# Altium PCB Power.PcbDoc
Units mil, origin at the board's own origin, x right, y up, seen from the top; angles counter-clockwise.
Board outline 1220.47 x 2874.02 mil, 2 copper layers (Top Layer, Bottom Layer), stack 21 mil thick; 81 components, 52 nets, 292 pads, 112 vias.
Unrouted connection lines stored in the file: 63.
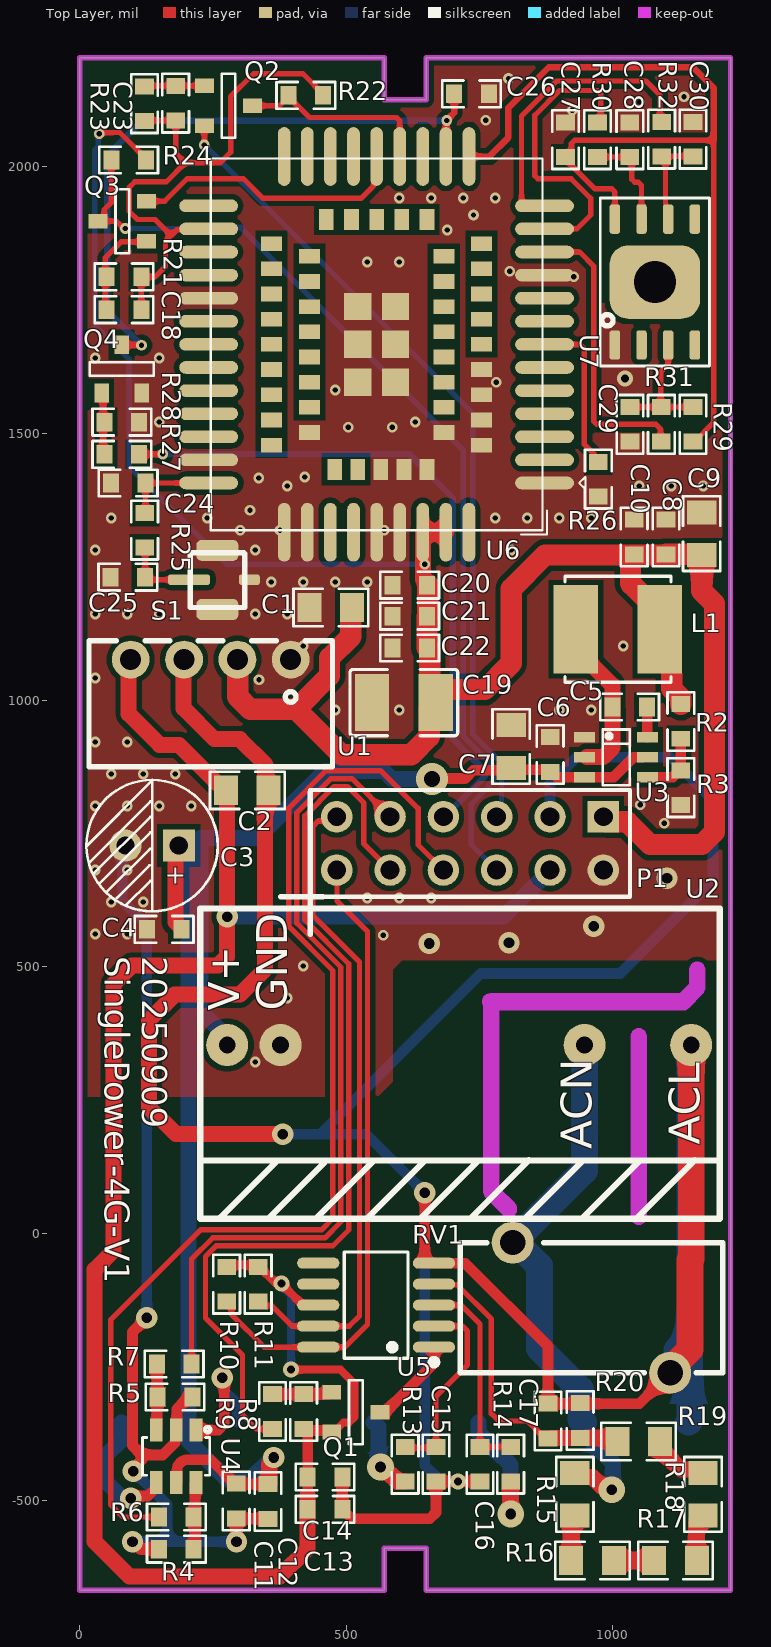
[diagram p0: Top Layer view]
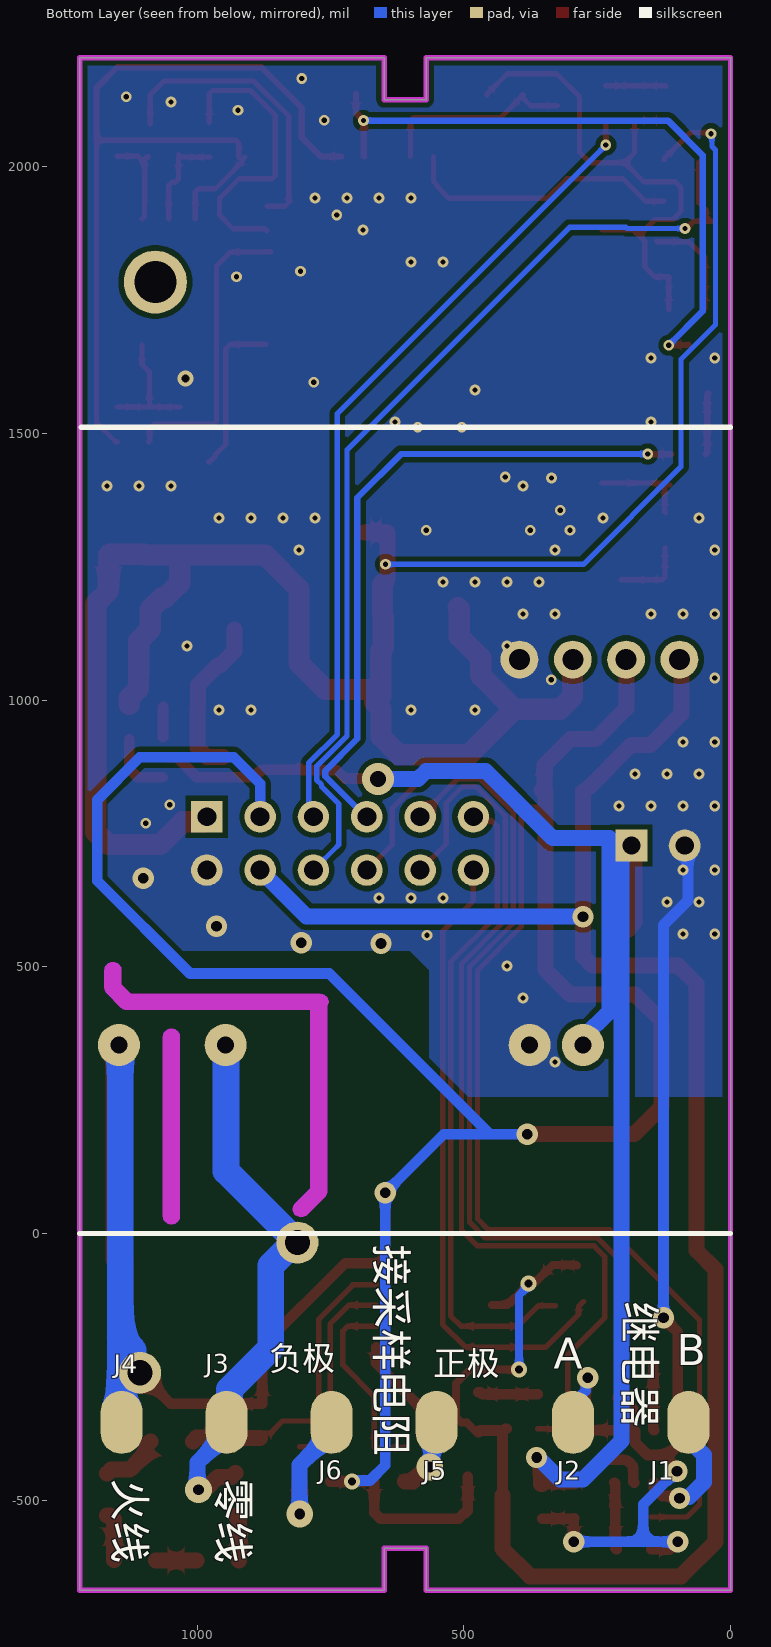
[diagram p1: Bottom Layer view, seen from below]

## Layer stack, top to bottom
Top Solder: solder mask 0.4, Solder Resist, Dk 3.5
Top Layer: signal copper 1.4
Dielectric 2: prepreg 2.8, Composite dielectric, Dk 4.1
Dielectric 1: prepreg 12.6, Composite dielectric, Dk 4.1
Dielectric 3: prepreg 2.8, Composite dielectric, Dk 4.1
Bottom Layer: signal copper 1.4
Bottom Solder: solder mask 0.4, Solder Resist, Dk 3.5

## Board outline
0,-669.29 0,2204.72 570.87,2204.72 570.87,2125.98 649.61,2125.98 649.61,2204.72 1220.47,2204.72 1220.47,-669.29 649.61,-669.29 649.61,-590.55 570.87,-590.55 570.87,-669.29
cut-out: 1033.32,32.2 ccw(c1048.34,32.2) 1063.35,32.2 1063.35,368.8 ccw(c1048.34,368.8) 1033.32,368.8
cut-out: 756.98,78.71 ccw(c772,78.71) 761.4,68.08 761.38,68.09 794.38,35.09 ccw(c805,45.71) 820.01,45.71 ccw(c805,45.71) 815.62,56.33 787.01,84.93 787.01,419.11 1131.56,419.11 ccw(c1131.56,434.13) 1142.19,423.52 1142.17,423.51 1168.68,450.02 1168.67,450 ccw(c1158.06,460.63) 1173.08,460.63 1173.08,493.92 ccw(c1158.06,493.92) 1143.05,493.92 1143.05,466.85 1125.34,449.14 769.7,449.14 ccw(c769.7,434.13) 756.98,426.15

## Design rules (kind name [scope] priority, off if disabled: settings)
Clearance "Via to pad" [IsVia vs IsPad] p1: gap=10 ignorepadtopadclearanceinfootprint=FALSE
Clearance Ploy [InPoly] p2: gap=10 ignorepadtopadclearanceinfootprint=FALSE
Clearance "Track to pad" [IsTrack vs IsPad] p3: gap=8 ignorepadtopadclearanceinfootprint=FALSE
Clearance "Track to track" [IsTrack vs IsTrack] p4: gap=5 ignorepadtopadclearanceinfootprint=FALSE
Clearance "Via to Track" [IsVia vs IsTrack] p5: gap=10 ignorepadtopadclearanceinfootprint=FALSE
Clearance "Via To Via" [IsVia vs IsVia] p6: gap=10 ignorepadtopadclearanceinfootprint=FALSE
ComponentClearance [All] p1: gap=0 collisioncheckmode=3 verticalgap=0 showdistances=FALSE
DiffPairsRouting [All] p1: maxlimit=10 minlimit=7 mostfreqgap=7 toplayer_minwidth=5 toplayer_maxwidth=100 toplayer_prefwidth=7 bottomlayer_minwidth=5 bottomlayer_maxwidth=100 bottomlayer_prefwidth=7 maxuncoupledlength=500
HoleSize [All] p1: absolutevalues=TRUE maxlimit=200 minlimit=1 maxpercent=80.000 minpercent=20.000
HoleToHoleClearance [All] p1: gap=5 allowstackedmicrovias=TRUE
MinimumSolderMaskSliver [All] p1: minsoldermaskwidth=0
PolygonConnect [All vs (InPadClass('All Pads'))] p1: connectstyle=Direct reliefconductorwidth=10 reliefentries=4 polygonreliefangle="90 Angle" airgapwidth=10
PolygonConnect GND焊盘 [InNet('GND_1') vs (InPadClass('All Pads'))] p2: connectstyle=Relief reliefconductorwidth=10 reliefentries=4 polygonreliefangle="90 Angle" airgapwidth=10
PolygonConnect GND过孔 [All vs IsVia] p3: connectstyle=Direct reliefconductorwidth=10 reliefentries=4 polygonreliefangle="90 Angle" airgapwidth=10
RoutingVias RoutingVias_1 [InNet('AGND_1')] p1: holewidth=10 width=20 viastyle="Through Hole" minholewidth=10 minwidth=20 maxholewidth=28 maxwidth=50
RoutingVias [All] p2: holewidth=10 width=20 viastyle="Through Hole" minholewidth=10 minwidth=20 maxholewidth=28 maxwidth=50
SilkToSilkClearance [All] p1: silktosilkclearance=0
SilkToSolderMaskClearance [IsPad] p1: minsilkscreentomaskgap=0 clearancetoexposedcopper=TRUE
SolderMaskExpansion [All] p1: expansion=1 istentingtop=FALSE
Width [All] p1: maxlimit=300 minlimit=5 preferedwidth=7 minimp=50.000000 maximp=50.000000 favimp=50.000000
23 further rules are at their usual default settings.

## Classes and differential pairs
component class 连接: P1
component class 继电器: C11 C12 J1 J2 R4 R5 R6 R7 U4
component class Power: C3 C4 C5 C6 C7 C8 C9 C10 L1 R2 R3 U2 U3
component class 4G: C18 C19 C20 C21 C22 C23 C24 C25 C26 C27 C28 C29 C30 Q2 Q3 Q4 R21 R22 R23 R24 R25 R26 R27 R28 R29 R30 R31 R32 S1 U6 U7
component class 计量: C1 C2 C13 C14 C15 C16 C17 J3 J4 J5 J6 Q1 R8 R9 R10 R11 R13 R14 R15 R16 R17 R18 R19 R20 RV1 U1 U5

## Components (designator, comment, footprint, x,y, rotation, side; value= is the part's Value field where it differs from the comment)
C1 "4.7uF/25V" 0805R 510.87,1173.82 r180 top
C2 "10uF/25V" 0805R 274.52,830.78 r0 top
C3 "100uF/25V" CAPPIND06 185.89,727.21 r180 top
C4 "104/25V" 0603R 125.96,570.22 r0 top
C5 "104/25V" 0603R 998.71,987.15 r0 top
C6 "10uF/25V" 0603R 882.2,930.49 r270 top
C7 "47uF/25V" 0805R 809.18,872.99 r90 top
C8 "10uF/25V" 0603R 1099.45,1338.45 r270 top
C9 "47uF/10V" 0805R 1166.5,1272.05 r90 top
C10 "104/10V" 0603R 1039.92,1338.45 r270 top
C11 "47uF/25V" 0603R 293.55,-534.34 r90 top
C12 "104/25V" 0603R 353.19,-535.29 r90 top
C13 "104/25V" 0603R 492.64,-517.47 r180 top
C14 "10uF/25V" 0603R 492.64,-456.85 r180 top
C15 "68nF/10V" 0603R 668.18,-400.22 r270 top
C16 "68nF/10V" 0603R 750.7,-400.22 r270 top
C17 "10nF/10V" 0603R 878.15,-384.28 r90 top
C18 "1nF/10V/0603" 0603R 50.72,1732.04 r0 top
C19 "100uF/10V" C1210 607.98,995.43 r180 top
C20 "10pF" 0603R 651.32,1215.46 r180 top
C21 "33pF" 0603R 651.32,1157.39 r180 top
C22 "100nF" 0603R 651.32,1097.71 r180 top
C23 "1nF/10V/0603" 0603R 180.18,2151.96 r270 top
C24 "NC" 0603R 58.42,1407.21 r0 top
C25 "NC" 0603R 57.77,1230.66 r0 top
C26 "10nF" 0603R 767.37,2137.03 r180 top
C27 "104" 0603R 911.13,2083.34 r270 top
C28 "33PF" 0603R 1031.75,2018.34 r90 top
C29 "33PF" 0603R 1031.99,1484.56 r90 top
C30 "33PF" 0603R 1150.1,2019.36 r90 top
J1 "J1" 贴片焊盘V1（3*2椭圆） 78.74,-354.33 r270 bottom
J2 "J1" 贴片焊盘V1（3*2椭圆） 295.28,-354.33 r270 bottom
J3 "J1" 贴片焊盘V1（3*2椭圆） 944.88,-354.33 r270 bottom locked
J4 "J1" 贴片焊盘V1（3*2椭圆） 1141.73,-354.33 r270 bottom locked
J5 "J1" 贴片焊盘V1（3*2椭圆） 551.18,-354.33 r90 bottom locked
J6 "J1" 贴片焊盘V1（3*2椭圆） 748.03,-354.33 r270 bottom locked
L1 "4.7uH/3A" 贴片电感5020 930.58,1132.9 r180 top
P1 "Header 6X2" HDR2X6 982.01,781.25 r180 top
Q1 "AO3401" SOT-23 472.7,-297.74 r270 top
Q2 "S8050" SOT-23 233.78,2151.96 r270 top
Q3 "S8050" SOT-23 125.28,1860.73 r90 top
Q4 "S8050" SOT-23 41.37,1575.81 r0 top
R2 "40.2K" 0603R 1127.4,992.57 r270 top
R3 "103" 0603R 1127.4,868.22 r270 top
R4 "4.7K/5%" 0603R 148.81,-592.11 r0 top
R5 "4.7K/5%" 0603R 211.42,-306.66 r180 top
R6 "100R/5%" 0603r 148.81,-531.84 r0 top
R7 "100R/5%" 0603R 144.84,-244.83 r0 top
R8 "47K/5%/0603" 0603R 420.01,-301.57 r270 top
R9 "4.7K/5%/0603" 0603R 361.51,-301.57 r270 top
R10 "2K/5%/0603" 0603R 275.51,-127.75 r90 top
R11 "2K/5%/0603" 0603R 334.66,-127.75 r90 top
R13 "510R/1%" 0603R 610.48,-465.22 r90 top
R14 "510R/1%" 0603R 808.07,-465.22 r90 top
R15 "390K" 0805R 928.51,-529.27 r90 top
R16 "390K" 0805R 1001.66,-613.28 r180 top
R17 "390K" 0805R 1157.2,-613.28 r180 top
R18 "390K" 0805R 1168.75,-449.27 r270 top
R19 "390K" 0805R 1008.08,-390.26 r0 top
R20 "510R/1%" 0603R 938.51,-318.29 r270 top
R21 "4.7K/5%/0603" 0603R 50.73,1793.66 r0 top
R22 "10K/5%/0603" 0603R 456.74,2134.02 r180 top
R23 "4.7K/5%/0603" 0603R 121.49,2150.91 r270 top
R24 "10K/5%/0603" 0603R 59.38,2012.74 r0 top
R25 "0R/5%/0603" 0603R 121.87,1351.3 r270 top
R26 "4.7K" 0603R 972.54,1446.83 r270 top
R27 "4.7K" 0603R 111.5,1461 r180 top
R28 "47K" 0603R 46.5,1521.27 r0 top
R29 "10K" 0603R 1150.23,1484.56 r90 top
R30 "0R" 0603R 971.11,2018.34 r90 top
R31 "0R" 0603R 1090.71,1484.56 r90 top
R32 "0R" 0603R 1091.51,2019.36 r90 top
RV1 "7S561K" 10D821K 959.74,-139.3 r0 top
S1 "SMA" RF1-00283天线座 207.18,1173.82 r90 top
U1 "B0303S" B1205S-1WR3 2050.03,1018.84 r180 top
U2 "X1071    90-240V" X1071 1146.8,353.29 r180 top locked
U3 "DIO6930" SOT-23-6DBV 946.81,930.49 r270 top
U4 "BL8023FCBT6R" SOT-23-6 218.22,-368.82 r180 top
U5 "BL0942" BL0942-10pin 664.4,-213.26 r90 top
U6 "ML307A" ML307A 556.83,1667.05 r180 top locked
U7 "SIM_MFF2" VQFN8 1078.57,1783.92 r90 top

## Footprints (in the part's own frame and the unit in brackets; to place one, negate y for a bottom-side part, rotate by r counter-clockwise, add the part's x,y. Pads: shape width x height; smd on the part's side, far side on the other; paste and mask are expansions set on the pad)
10D821K [mm]
  round 2 hole 1.2 copper offset 0,0: 1(-3.75,3.1) 2(3.75,-3.1)
  silkscreen extent -6.25,-3.1 6.25,3.1
0603R [mil]
  rect 30x35 smd: 1(0,0) 2(65,0)
  silkscreen extent -22,-25 88,25
0603r [mil]
  rect 30x35 smd: 1(0,0) 2(65,0)
  silkscreen extent -22,-25 88,25
0805R [mil]
  rect 45x55 smd: 1(0,0) 2(80,0)
  silkscreen extent -30,-35 110,35
B1205S-1WR3 [mm]
  round 1.8 hole 1: 1(42.019,-1.451) 2(44.559,-1.451) 3(47.099,-1.451) 4(49.639,-1.451)
  silkscreen extent 40.03,-2.35 51.63,3.65
BL0942-10pin [mm]
  oval 0.525x2.014 smd: 1(0,0) 2(1,0) 3(2,0) 4(3,0) 5(4,0) 6(4,5.513) 7(3,5.513) 8(2,5.513) 9(1,5.513) 10(0,5.513)
  silkscreen extent -0.86,-0.15 4.53,4.28
C1210 [mm]
  rect 1.635x2.7 smd paste-100 mask+0.051: 1(-1.517,0) 2(1.517,0)
  silkscreen extent -2.56,-1.58 2.56,1.58
CAPPIND06 [mil]
  rect 60x60 hole 34: 1(0,0)
  round 60 hole 34: 2(100,0)
  silkscreen extent -73,-123 173,123
HDR2X6 [mm] "Connector; Header; 6x2 Position"
  rect 1.5x1.5 hole 0.9: 1(0,0)
  round 1.5 hole 0.9: 2(0,2.54) 3(2.54,0) 4(2.54,2.54) 5(5.08,0) 6(5.08,2.54) 7(7.62,0) 8(7.62,2.54) 9(10.16,0) 10(10.16,2.54) 11(12.7,0) 12(12.7,2.54)
  silkscreen extent -1.27,-1.27 13.97,3.81
ML307A [mm]
  oval 2.8x0.6 smd: 1(-8,6.6) 2(-8,5.5) 3(-8,4.4) 4(-8,3.3) 5(-8,2.2) 6(-8,1.1) 7(-8,0) 8(-8,-1.1) 9(-8,-2.2) 10(-8,-3.3) 11(-8,-4.4) 12(-8,-5.5) 13(-8,-6.6) 23(8,-6.6) 24(8,-5.5) 25(8,-4.4) 26(8,-3.3) 27(8,-2.2) 28(8,-1.1) 29(8,0) 30(8,1.1) 31(8,2.2) 32(8,3.3) 33(8,4.4) 34(8,5.5) 35(8,6.6)
  oval 0.6x2.8 smd: 14(-4.4,-8.95) 15(-3.3,-8.95) 16(-2.2,-8.95) 17(-1.1,-8.95) 18(0,-8.95) 19(1.1,-8.95) 20(2.2,-8.95) 21(3.3,-8.95) 22(4.4,-8.95) 36(4.4,8.95) 37(3.3,8.95) 38(2.2,8.95) 39(1.1,8.95) 40(0,8.95) 41(-1.1,8.95) 42(-2.2,8.95) 43(-3.3,8.95) 44(-4.4,8.95)
  rect 1x0.7 smd: 45(-5,4.8) 46(-5,3.6) 47(-5,2.4) 48(-5,1.2) 49(-5,0) 50(-5,-1.2) 51(-5,-2.4) 52(-5,-3.6) 53(-5,-4.8) 59(5,-4.8) 60(5,-3.6) 61(5,-2.4) 62(5,-1.2) 63(5,0) 64(5,1.2) 65(5,2.4) 66(5,3.6) 67(5,4.8) 73(-3.2,4.2) 74(-3.2,3) 75(-3.2,1.8) 76(-3.2,0.6) 77(-3.2,-0.6) 78(-3.2,-1.8) 79(-3.2,-3) 80(-3.2,-4.2) 81(3.2,-4.2) 82(3.2,-3) 83(3.2,-1.8) 84(3.2,-0.6) 85(3.2,0.6) 86(3.2,1.8) 87(3.2,3) 88(3.2,4.2)
  rect 0.7x1 smd: 54(-2.4,-5.95) 55(-1.2,-5.95) 56(0,-5.95) 57(1.2,-5.95) 58(2.4,-5.95) 68(2,5.95) 69(0.9,5.95) 70(-0.2,5.95) 71(-1.3,5.95) 72(-2.4,5.95)
  rect 1.3x1.3 smd: 89(-0.9,1.8) 90(-0.9,0) 91(-0.9,-1.8) 92(0.9,-1.8) 93(0.9,0) 94(0.9,1.8)
  silkscreen extent -9.94,-8.85 7.9,9.05
RF1-00283天线座 [mil]
  rrect50% 19.68x78.74 smd: 1(52,2)
  rrect50% 39.37x78.74 smd: 2(-4,-51) 2(107,-51)
  rrect50% 19.68x39.37 smd: 2(52,-111)
  silkscreen extent 0,-102 102,0
SOT-23 [mm]
  rect 0.7x0.9 smd: 1(0,0) 2(1.9,0) 3(0.95,2.3)
  silkscreen extent -0.57,0.82 2.47,1.47
SOT-23-6 [mm]
  rect 0.6x1.1 smd: 1(0,0) 2(0.95,0) 3(1.9,0) 4(1.9,2.5) 5(0.95,2.5) 6(0,2.5)
  silkscreen extent -0.69,-0.15 2.55,2.15
SOT-23-6DBV [mm]
  rect 0.5x1 smd: 1(0,0) 2(0.95,0) 3(1.9,0) 4(1.9,3) 5(0.95,3) 6(0,3)
  silkscreen extent -0.37,0.86 2.29,2.16
VQFN8 [mm]
  rrect50% 3.5x4.3 smd: 0(0,0)
  round 3 hole 2: 0(0,0)
  rrect50% 1.4x0.5 smd: 1(-3,1.905) 2(-3,0.635) 3(-3,-0.635) 4(-3,-1.905) 5(3,-1.905) 6(3,-0.635) 7(3,0.635) 8(3,1.905)
  silkscreen extent -4,-2.6 4,2.6
X1071 [mm]
  round 2 hole 0.8: 1(0,0) 2(5.08,0) 4(19.56,0) 5(22.1,0)
  silkscreen extent -1.36,-6.5 23.38,8.28
贴片焊盘V1（3*2椭圆） [mm]
  oval 3x2 smd: 1(0,0)
贴片电感5020 [mm]
  rect 2.124x4.22 smd: 1(0,0) 2(-4,0)
  silkscreen extent -4.53,-2.53 0.53,2.53

## Part data
C1 C2: library part CAP+
C3 C7 C9 C19: library part "Cap Pol1", "Polarized Capacitor (Radial)", LatestRevisionDate=17-Jul-2002, LatestRevisionNote="Re-released for DXP Platform.", PackageDescription="Polarized Capacitor (Radial); 2 Leads", PackageReference=RB7.6-15, Published=8-Jun-2000, Publisher="Altium Limited"
C4 C5 C10 C11 C12 C13 C14 C20 C21 C22 C26: library part CAP_1
C6 C8 C15 C16 C17 C18 C23 C24 C25 C27 C28 C29 C30: library part CAP
L1: library part Inductor, "Inductor", Code_IEC=1005, Code_JEITA=0402, LatestRevisionDate=29-May-2009, LatestRevisionNote="IPC-7351 Footprint Added.", PackageDescription="Chip Inductor", PackageReference=0402-A, Published=8-Jun-2000, Publisher="Altium Limited"
P1: "Header, 6-Pin, Dual row", LatestRevisionDate=17-Jul-2002, LatestRevisionNote="Re-released for DXP Platform.", Publisher="Altium Limited"
Q1: library part PNP
Q2 Q3 Q4: library part NPN
R2 R3 R22 R24 R29 R30 R31 R32: library part Res2, "Resistor", LatestRevisionDate=17-Jul-2002, LatestRevisionNote="Re-released for DXP Platform.", PackageDescription="Axial Device, Thru-Hole; 2 Leads; 0.4 in Pin Spacing", PackageReference=AXIAL-0.4, Published=8-Jun-2000, Publisher="Altium Limited"
R4 R5 R6 R7 R8 R9 R10 R11 R13 R14 R15 R16 R17 R18 R19 R20 R21 R23 R25 R26 R27 R28: library part RES
RV1: library part "Res Varistor", "Varistor (Voltage-Sensitive Resistor)", Code_IPC=RESC2012, LatestRevisionDate=29-May-2009, LatestRevisionNote="IPC-7351 Footprint Added.", PackageDescription="Chip Resistor 0805 Case Size", PackageReference=6-0805, PackageVersion=Mar-2003, Published=24-Mar-1999, Publisher="Altium Limited"
U1: library part B0505S
U2: library part AD2DC_EMC
U3: library part BL8032
U4: library part BL8023HCB6TR, JLCPCB Part Class="Extended Part", LCSC Part Name="BL8023HCB6TR 继电器驱动芯片 停产", Manufacturer=BL(上海贝岭), Add into BOM=yes, Convert to PCB=yes, Datasheet=https://atta.szlcsc.com/upload/public/pdf/source/20190920/C431145_DEC39E836DB2A2F1462A8BB350F12ABB.pdf, Device=BL8023HCB6TR, Manufacturer Part=BL8023HCB6TR, Supplier=LCSC, Supplier Footprint=SOT-23-6, Supplier Part=C431145, Symbol=BL8023HCB6TR
U5: library part BL0942_C2837510, JLCPCB Part Class="Extended Part", LCSC Part Name=BL0942内置时钟免校准计量芯片, Manufacturer=BL(上海贝岭), Add into BOM=yes, Convert to PCB=yes, Datasheet=https://atta.szlcsc.com/upload/public/pdf/source/20220627/BFAD44701CA6DE9A8853C5A4834B6884.pdf, Device=BL0942_C2837510, Manufacturer Part=BL0942, Supplier=LCSC, Supplier Footprint=SSOP-10-150mil, Supplier Part=C2837510, Symbol=BL0942
U6: PCB DECAL=MOD_ML307

## Via types
v1: diameter 20, hole 10, Top Layer to Bottom Layer, 90 vias
v2: diameter 40, hole 20, Top Layer to Bottom Layer, 14 vias
v3: diameter 30, hole 15, Top Layer to Bottom Layer, 4 vias
v4: diameter 50, hole 20, Top Layer to Bottom Layer, 3 vias
v5: diameter 60, hole 30, Top Layer to Bottom Layer, 1 vias

## Nets (pads, with @x,y where several pads share a name; then routed paths per layer and width w, separated by ;. In a path a pad name is that pad's centre, name@x,y a point inside that pad or via, vN(x,y) a via of type N, cw(c..) or ccw(c..) an arc to the next point about the centre after c; other vN are vias at no path point)
4G_MCU_RXD: P1.6 Q3.3 R24.1 | length 1834.5
  Top Layer w10: R24.1@59.38,2008.34 59.38,1932.88 46.03,1919.54 46.03,1906.91 37.25,1898.13 Q3.3 68.66,1898.13 82.5,1884.29 v1(85.21,1884.29)
  Bottom Layer w10: v1(85.21,1884.29) 193.83,1884.29 196.04,1886.5 301.95,1886.5 719.19,1469.26 719.19,932.67 776.09,875.77 776.09,850.61 767.05,841.57 767.05,837.85 734.48,805.27 734.48,728.93 737.4,726 P1.6@782.2,681.2
4G_MCU_TXD: P1.5 Q2.2 | length 1530.5
  Top Layer w10: v1(233.78,2040.95) Q2.2
  Bottom Layer w10: v1(233.78,2040.95) 737.3,1537.42 737.3,935.77 791.09,881.98 791.09,790.09 P1.5@782.2,781.2
4G_Reset: P1.7 R27.1 | length 1279.8
  Top Layer w12: R27.1 154.98,1461 v1(155.51,1461.53) v1@156.04,1462.06
  Bottom Layer w12: v1(155.51,1461.53) 617.67,1461.53 699.78,1379.42 699.78,927.49 760.09,867.18 760.09,857.24 684.05,781.2 P1.7@682.2,781.2
BL0942_Control: P1.10 R9.2 | length 1784.8
  Top Layer w10: R9.2 331.18,-366.57 305.45,-340.85 305.45,-227.92 235.98,-158.44 235.98,-43.14 255.78,-23.33 474.61,-23.33 504.61,6.67 504.61,505.54 422.39,587.76 422.39,782.91 477.16,837.67 502.1,837.67 533,806.77 533,730.4 P1.10@582.2,681.2
BL0942_RXD: P1.11 R11.1 U5.9 | length 1226.2
  Top Layer w10: R11.1@328.91,-135.54 359.87,-135.54 398.22,-173.89 U5.9 505.51,-173.89 524.86,-154.54 524.86,508.57 437.39,596.04 437.39,763.36 447.23,773.2 474.2,773.2 P1.11@482.2,781.2
BL0942_TXD: P1.12 R10.1 U5.10 | length 1201.5
  Top Layer w10: R10.1 284.78,-137.02 284.78,-151.9 346.15,-213.26 U5.10 497.32,-213.26 539.86,-170.72 539.86,566.32 482.48,623.7 P1.12@482.48,680.92
GND: C1.2 C3.2 C4.1 C6.1 C7.2 C8.1 C9.2 C10.1 C11.1 C12.1 C19.2 C20.2 C21.2 C22.2 C24.1 C25.1 C26.1 C27.1 C28.2 C29.1 C30.2 P1.2 Q4.2 R3.2 R4.1 R5.1 R26.2 R28.2 S1.2 U1.1 U2.4 U3.1 U4.2 U6.1 U6.10 U6.27 U6.34 U6.36 U6.37 U6.40 U6.41 U6.45 U6.46 U6.47 U6.48 U6.70 U6.71 U6.72 U6.73 U6.88 U6.89 U6.90 U6.91 U6.92 U6.93 U6.94 U7.1 | length 1906
  Top Layer w20: v2(99.01,-578.28) 112.83,-592.11 R4.1 ; v2(100.48,-445.82) 100.48,-440.4 116.91,-423.97 116.91,-415.57 ; v2(125.76,-158.26) 99.01,-185.02 99.01,-397.66 116.91,-415.57 ; R5.1 211.42,-309.16 206.42,-314.16 197.97,-314.16 182.63,-329.49 182.63,-367.01 179.01,-370.63 179.01,-392.15 155.59,-415.57 116.91,-415.57 ; C11.1 C11.1@294.03,-534.82 ; v2(294.03,-578.28) C11.1@294.03,-534.82 ; C12.1 352.71,-534.82 C11.1@294.03,-534.82
  Bottom Layer w20: C3.2@79.81,726.71 79.81,681.56 79.81,624.15 125.76,578.2 v2(125.76,-158.26) ; v2(99.01,-578.28) 163.92,-578.28 ; v2(100.48,-445.82) 101.57,-445.82 163.92,-508.17 163.92,-578.28 ; v2(294.03,-578.28) 163.92,-578.28
  other v1: 329.27,321.56 389.27,441.56 419.27,501.56 569.27,559 29.27,561.56 89.27,561.56 59.27,621.56 119.27,621.56 539.27,629 599.27,629 659.27,629 29.27,681.56 89.27,681.56 1096.49,769.23 29.27,801.56 89.27,801.56 149.27,801.56 209.27,801.56 1051.49,803.78 59.27,861.56 119.27,861.56 179.27,861.56 29.27,921.56 89.27,921.56 479.27,981.56 599.27,981.56 899.27,981.56 959.27,981.56 336.24,1038.11 29.27,1041.56 419.27,1101.56 1019.27,1101.56 29.27,1161.56 89.27,1161.56 149.27,1161.56 329.27,1161.56 389.27,1161.56 359.27,1221.56 419.27,1221.56 479.27,1221.56 539.27,1221.56 29.27,1281.56 329.27,1281.56 809.27,1281.56 300.9,1318.63 375.74,1318.63 570.87,1318.63 59.27,1341.56 239.27,1341.56 779.27,1341.56 839.27,1341.56 899.27,1341.56 959.27,1341.56 319.34,1355.83 389.27,1401.56 1049.27,1401.56 1109.27,1401.56 1169.27,1401.56 335.7,1416.64 422.17,1418.43 503.86,1511.81 586.32,1511.81 149.27,1521.56 629.27,1521.56 479.27,1581.56 781.31,1596.18 29.27,1641.56 149.27,1641.56 926.45,1793.66 806.25,1804.07 539.27,1821.56 599.27,1821.56 689.27,1881.56 738.57,1909.61 599.27,1941.56 659.27,1941.56 719.27,1941.56 779.27,1941.56 761.51,2087.53 923.61,2105.84 1049.27,2121.56 1133.14,2131.52 804,2165.78
  other v2: 655.46,543.65 805.22,545.22 963.89,575.98 1101.35,665.99
  other v3: 1022.19,1603.53
IN1: C16.1 R14.2 U5.3 | length 388.5
  Top Layer w10: U5.3 715.14,-134.52 750.7,-170.09 C16.1 R14.2
IP1: C15.1 R13.2 U5.2 | length 366.8
  Top Layer w10: R13.2 612.06,-401.8 666.6,-401.8 C15.1 668.18,-305.7 727.04,-246.84 727.04,-183.33 717.61,-173.89 U5.2
Lin: C2.2 C13.1 C14.1 C15.2 C16.2 C17.2 J4.1 P1.3 R20.1 RV1.2 U1.3 U2.1 U5.5 | length 6382.1
  Top Layer w20: C14.1 492.64,-519.97 497.64,-524.97 500.14,-524.97 510.14,-534.97 656.46,-534.97 668.18,-523.26 C15.2 v3(709.44,-465.22) C16.2 ; v2(647.3,76.2) 647.3,-55.47 647.61,-55.78 U5.5 722.7,-55.78 878.15,-211.24 C17.2 1049.45,-319.28 RV1.2
  Top Layer w30: U1.3@195.12,1075.34 195.12,984.53 252.82,926.82 300.46,926.82 348.69,878.59 348.69,836.73 C2.2@354.58,830.84 ; C2.2@347.21,830.02 347.21,494.73 300.23,447.76 178.29,447.76 129.81,399.28 129.81,237.01 180.82,186 v2(381,186)
  Top Layer w50: RV1.2 1107.38,-254.87 1144.56,-217.69 1144.56,-50.3 1146.8,-48.07 U2.1
  Bottom Layer w20: v2(381,186) 450.86,186 ; v3(709.44,-465.22) 707.53,-463.31 675.99,-463.31 647.3,-434.62 v2(647.3,76.2) 537.5,186 450.86,186 ; P1.3 882.01,843.2 931.75,892.93 1107.63,892.93 1187.75,812.81 1187.75,661.57 1013.57,487.39 752.25,487.39 450.86,186
  Bottom Layer w50: RV1.2@1120.26,-270.79 1120.26,-219.01 1144.26,-195 ; U2.1@1141.3,358.79 U2.1 1144.26,350.76 1144.26,-195 ; J4.1 1144.26,-351.8 1144.26,-195
MAIN_RXD: Q2.3 R22.2 U6.17 | length 376.2
  Top Layer w10: Q2.3 374.78,2114.56 R22.2@391.74,2131.52 ; R22.2@388.1,2135.16 R22.2@391.74,2131.52 ; R22.2 R22.2@391.74,2131.52 ; U6.17 600.14,2086.53 594.28,2092.39 430.87,2092.39 R22.2@391.74,2131.52
MAIN_TXD: Q3.2 U6.18 | length 525.6
  Top Layer w10: Q3.2 159.4,1935.53 201.56,1977.69 307.02,1977.69 343.79,1940.92 527.56,1940.92 550.83,1964.19 550.83,1966.42 556.83,1972.42 U6.18
NET_LIGHT: U6.16
NET_STATE: U6.25
NetC5_1: C5.1 L1.1 U3.2 | length 308.3
  Top Layer w30: L1.1 930.58,1091.64 957.39,1064.83 962.13,1064.83 998.71,1028.25 998.71,984.65 999.24,984.12 999.24,910.87 981.66,893.3 U3.2@951.5,893.3
NetC5_2: C5.2 U3.6 | length 57.4
  Top Layer w20: C5.2 1064.31,986.54 1064.31,930.65 1064.47,930.49 U3.6
NetC18_1: C18.1 Q3.1 R21.1 | length 201.3
  Top Layer w10: C18.1 48.22,1734.54 48.22,1793.66 48.22,1829.65 77.86,1859.29 137.13,1859.29 Q3.1@138.19,1860.35
NetC23_1: C23.1 Q2.1 R23.1 | length 112.7
  Top Layer w10: R23.1 122.54,2151.96 C23.1 Q2.1
NetC24_2: C24.2 R25.1 U6.35 | length 175.2
  Top Layer w10: C24.2@114.19,1403.24 C24.2@114.34,1403.38 ; R25.1 123.42,1352.84 C24.2 U6.35
NetC25_2: C25.2 R25.2 S1.1 | length 140.4
  Top Layer w10: R25.2 122.77,1285.4 C25.2 127.6,1225.82 S1.1
NetC28_1: C28.1 R30.1 U7.7 | length 188.9
  Top Layer w10: R30.1@976.05,2018.34 1030.47,2018.34 C28.1@1035.12,2022.99 ; C28.1@1035.12,2018.34 1035.12,1976.89 1040.97,1971.03 1047.71,1971.03 1053.57,1965.17 U7.7
NetC29_2: C29.2 R29.2 R31.2 U7.3 | length 240.9
  Top Layer w10: C29.2 R31.2 ; U7.3 1103.57,1629.14 1089.39,1614.96 1089.39,1550.88 R31.2 ; R29.2 1097.15,1549.56 R31.2
NetC30_1: C30.1 R32.1 U7.6 | length 188.6
  Top Layer w10: U7.6 1098.73,1906.88 1098.73,1930.3 1098.58,1930.45 1098.58,2012.28 R32.1 1094.01,2019.36 1099.83,2013.53 R32.1@1104.01,2009.36 ; R32.1@1103.57,2012.46 1111.19,2020.08 C30.1@1150.1,2020.08
NetJ5_1: J5.1 R13.1 | length 146.8
  Top Layer w30: v4(564.01,-438.16) 568.36,-438.16 595.42,-465.22 R13.1
  Bottom Layer w30: J5.1 560.18,-363.33 560.18,-434.33 v4(564.01,-438.16)
NetJ6_1: J6.1 R14.1 | length 257.8
  Top Layer w30: v4(808.07,-526.26) R14.1
  Bottom Layer w30: J6.1 748.03,-374.02 808.07,-434.05 v4(808.07,-526.26)
NetQ1_1: Q1.1 R8.1 R9.1 | length 112.8
  Top Layer w20: R9.1 464.93,-301.57 468.76,-297.74 Q1.1
NetQ1_3: Q1.3 U5.1 | length 169.2
  Top Layer w20: Q1.3 567.03,-331.37 576.33,-331.37 664.4,-243.29 U5.1
NetQ4_1: Q4.1 R27.2 R28.1 | length 116.9
  Top Layer w12: Q4.1 43.93,1573.25 43.93,1463.56 R27.2
NetR2_2: R2.2 R3.1 U3.4 | length 126.3
  Top Layer w20: U3.4 1112.36,855.69 1124.9,868.22 R3.1 R2.2@1127.4,926.82
NetR4_2: R4.2 R6.2 U4.6 | length 126.7
  Top Layer w20: R4.2 216.41,-589.51 216.41,-469.05 U4.6
NetR5_2: R5.2 R7.1 U4.3 | length 124.7
  Top Layer w20: U4.3 144.92,-367.32 144.92,-244.91 R7.1
NetR15_1: R15.1 R16.2 | length 86.9
  Top Layer w30: R16.2 921.66,-536.13 R15.1
NetR16_1: R16.1 R17.2 | length 75.5
  Top Layer w30: R16.1 R17.2
NetR17_1: R17.1 R18.2 | length 91.1
  Top Layer w30: R17.1@1156.15,-612.23 1156.15,-541.87 1156.25,-541.77 1156.25,-536.77 1163.75,-529.27 R18.2
NetR18_1: R18.1 R19.2 | length 114.1
  Top Layer w30: R19.2 1095.58,-397.76 1095.58,-412.07 1126.63,-443.12 1161.25,-443.12 R18.1@1168.75,-450.62
Nin: J3.1 R15.2 RV1.1 U2.2 | length 1298
  Top Layer w30: R15.2 936.01,-456.77 961.22,-456.77 981.2,-476.76 993.93,-476.76 v4(997.76,-480.58)
  Bottom Layer w30: J3.1 944.88,-374.92 999.87,-429.91 999.87,-478.47 v4(997.76,-480.58)
  Bottom Layer w50: U2.2@941.3,358.79 U2.2 946.8,117.45 946.15,116.8 ; J3.1 939.38,-348.83 939.38,-292.67 862.32,-215.6 862.32,-60.91 818.67,-17.25 RV1.1 946.15,116.8 ; U2.2@946.15,352.65 946.15,116.8
PWR_ON/OFF: R26.1 U6.7 | length 304.5
  Top Layer w10: U6.7 938.13,1667.05 946.48,1658.69 946.48,1479.53 966.3,1459.71 966.3,1457.21 976.3,1447.21 R26.1@978.8,1447.21
Relay_C_A: P1.9 R7.2 | length 1537.9
  Top Layer w10: R7.2 209.84,-48.07 249.57,-8.33 460,-8.33 489.61,21.28 489.61,499.33 407.39,581.55 407.39,789.12 470.94,852.67 510.73,852.67 P1.9@582.2,781.2
Relay_C_B: P1.8 R6.1 | length 2182.2
  Top Layer w10: R6.1 81.52,-531.84 58.07,-508.39 58.07,-162.02 226.76,6.67 453.79,6.67 474.61,27.49 474.61,493.11 392.39,575.34 392.39,797.87 462.19,867.67 563.88,867.67 634.61,796.94 634.61,728.79 P1.8@682.2,681.2
Relay_O_A: J1.1 U4.4 | length 248.2
  Top Layer w20: v2(95.54,-496.36) 99.36,-492.53 127.98,-492.53 143.42,-477.09 U4.4
  Bottom Layer w30: J1.1 78.74,-386.59 49.37,-415.96 49.37,-465.9 77.91,-494.44 93.62,-494.44 v2(95.54,-496.36)
Relay_O_B: J2.1 U4.1 | length 240.8
  Top Layer w20: U4.1 259.61,-368.82 271.33,-357.1 271.33,-274.68 v2(267.5,-270.85)
  Bottom Layer w20: v2(267.5,-270.85) 271.33,-274.68 271.33,-294.8 295.28,-318.75 J2.1
RESET_N: C26.2 Q4.3 U6.15 | length 1207.4
  Top Layer w12: Q4.3 79.17,1665.96 115.45,1665.96 v1(115.85,1665.57) ; U6.15 687.56,2020.22 687.56,2085.93 v1(688.36,2086.74) 688.36,2087.53 702.37,2101.53 C26.2
  Bottom Layer w12: v1(115.85,1665.57) 51.88,1729.54 51.88,2021.4 117.22,2086.74 v1(688.36,2086.74)
USIM_CLK: R32.2 U6.13 | length 557.8
  Top Layer w10: U6.13@868.9,1926.01 835.58,1926.01 828.41,1933.19 828.41,2095.13 894.1,2160.83 1061.97,2160.83 1088.34,2134.45 R32.2@1088.34,2080.18
USIM_DATA: R31.1 U6.11 | length 560
  Top Layer w10: U6.11@861.83,1840.96 U6.11@871.79,1840.96 ; U6.11 937.7,1840.28 963.89,1814.09 963.89,1522.93 969.75,1517.07 1080.86,1517.07 1089.22,1508.7 1089.22,1486.05 R31.1
USIM_DET: U6.79
USIM_RST: R30.2 U6.12 | length 567.6
  Top Layer w10: U6.12@869.2,1879.83 873.29,1883.91 932.69,1883.91 958.39,1909.61 958.39,1940.92 921.62,1977.69 859.3,1977.69 853.44,1983.55 853.44,2096.45 900.15,2143.17 971.31,2143.17 977.17,2137.31 R30.2@977.17,2083.57
USIM_VDD: C27.2 R29.1 U6.14 U7.8 | length 1725
  Top Layer w10: C27.2 917.51,2008.34 917.51,2007.53 966.23,1958.81 997.71,1958.81 1000.64,1955.88 1003.57,1952.95 U7.8 ; C27.2@922.03,2018.04 922.03,2043.78 927.89,2049.64 1188.93,2049.64 1188.93,1520.76 1152.73,1484.56 R29.1
  Top Layer w12: U6.14 768.27,2019.41 804,2055.14 804,2110.88 879.82,2186.71 1150.04,2186.71 1188.93,2147.82 1188.93,2049.64
VCC12: C3.1 C4.2 C6.2 C7.1 C11.2 C12.2 U2.5 U3.3 U3.5 U4.5 | length 3123
  Top Layer w20: U4.5 182.63,-465.43 182.63,-444.34 cw(c202.63,-444.4) 182.89,-441.18 183.76,-435.89 187.15,-431.74 cw(c202.63,-444.4) 191.91,-427.52 192.5,-427.14 cw(c203.69,-446.74) 203.69,-424.17 245.89,-424.17 291.05,-469.34 C11.2 294.03,-469.82 352.71,-469.82 C12.2 ; v5(660.7,852.18) 661.45,852.92 722.55,852.92 738.22,868.59 804.79,868.59 C7.1 812.93,869.24 878.45,869.24 C6.2 884.7,865.49 894.5,855.69 U3.3 1001.37,855.69 1038.61,892.93 U3.5@1055.24,892.93
  Top Layer w30: C3.1@179.81,726.71 179.81,583.86 190.96,572.72 C4.2 ; C12.2 355.69,-470.29 355.69,-430.95 363.67,-422.97 v2(363.67,-420.26)
  Bottom Layer w30: C3.1 C3.1@210.05,703.05 ; C3.1@202.27,704.25 226.86,728.84 226.86,416.34 276.72,366.48 U2.5 ; C3.1@203.97,702.55 203.97,-388.87 276.22,-461.11 320.11,-461.11 360.96,-420.26 v2(363.67,-420.26) ; 226.86,741.09 333.29,741.09 459.32,867.12 570.7,867.12 585.64,852.18 v5(660.7,852.18)
VCC33: C1.1 C8.2 C9.1 C10.2 C19.1 C20.1 C21.1 C22.1 L1.2 P1.1 R2.1 R24.2 U1.2 U6.42 U6.43 | length 4351.6
  Top Layer w10: v1(36.65,2062.27) 38.57,2064.19 61.27,2064.19 61.55,2064.46 75.16,2064.46 124.38,2015.24 R24.2
  Top Layer w30: C20.1@651.32,1217.96 643.45,1225.82 U6.42 U6.43
  Top Layer w40: U1.2@296.24,1075.48 296.24,1006.42 319.67,982.99 405.52,982.99 ; C1.1 508.37,1171.32 508.37,1119.02 468.51,1079.15 468.51,1045.98 405.52,982.99 ; C20.1@651.32,1217.96 652.5,1216.77 652.5,1158.56 C21.1 C22.1 656.18,1092.84 656.18,1006.97 C19.1 ; P1.1@982.01,777.3 987.59,771.72 1026.98,771.72 1069.47,729.23 1167.04,729.23 1190.47,752.66 1190.47,1180.84 1166.5,1204.81 C9.1 ; C10.2@1032.86,1272.05 1032.86,1219.4 1060.21,1192.05 1066.25,1192.05 1088.06,1170.24 L1.2 1109.87,1111.09 1109.87,1046.52 1110,1046.4 1110,1021.48 1127.4,1004.08 R2.1@1127.4,991.82 ; C8.2@1099.45,1272.05 872.64,1272.05 809.18,1208.6 809.18,1069.26 759.91,1019.98 679.91,1019.98 667.72,1007.8 C19.1 ; C8.2@1099.54,1273.54 C9.1@1165.01,1273.54 ; 405.52,982.99 490.83,897.67 621.58,897.67 655.54,931.63 655.54,983.24 C19.1
  Bottom Layer w10: v1(36.65,2062.27) 34.74,2060.36 34.74,2038.03 28.22,2031.51 28.22,1703.84 92.85,1639.21 92.85,1437.78 275.99,1254.63 v1(646.96,1254.63)
VCC33_G: C2.1 C13.2 C14.2 P1.4 Q1.2 R8.2 R10.2 R11.2 U1.4 U5.8 | length 3913.7
  Top Layer w15: R10.2@287.86,-59.7 288.55,-59.01 333.42,-59.01 365.72,-91.32 375.8,-91.32 v3(378.67,-94.19) 378.67,-94.67 418.53,-134.52 U5.8 ; v3(396.4,-255.52) 488.87,-255.52 515.22,-281.86 515.22,-344.29 504.61,-354.9 494.28,-354.9 476.63,-372.55 Q1.2
  Top Layer w20: R8.2 422.51,-366.57 R8.2@425.5,-369.56 ; 427.64,-480.58 427.64,-371.7 R8.2@425.5,-369.56 ; Q1.2 469.71,-369.56 R8.2@425.5,-369.56
  Top Layer w30: U1.4 92.02,1072.25 92.02,974.07 149.78,916.31 185.92,916.31 C2.1@267.21,835.02 ; C2.1@276.58,828.71 276.58,519.57 259.01,502 97.73,502 63.81,468.08 63.81,-32.05 28.04,-67.82 28.04,-577.86 93.18,-642.99 375.56,-642.99 427.64,-590.92 427.64,-491.11 ; C13.2 C13.2@427.64,-506.94
  Bottom Layer w15: v3(378.67,-94.19) 378.67,-98.25 396.4,-115.97 v3(396.4,-255.52)
  Bottom Layer w30: v2(276.58,594) 794.77,594 P1.4
VDD_EXT: C18.2 C23.2 R21.2 R22.1 R23.2 U6.24 | length 1072.4
  Top Layer w10: C18.2 R21.2 141.27,1793.66 160.98,1813.37 160.98,1860.53 171.66,1871.21 ; R23.2 122.54,2086.96 C23.2 180.18,2026.36 198.68,2007.85 ; U6.24 240.17,1881.89 182.34,1881.89 171.66,1871.21 ; R22.1 456.74,2136.52 418.7,2174.56 326.26,2174.56 283.22,2131.52 283.22,2027.29 263.79,2007.85 198.68,2007.85 ; 171.66,1871.21 141.57,1901.3 108.21,1901.3 92.8,1916.71 92.8,1961.29 103.53,1972.03 162.86,1972.03 198.68,2007.85
VP: C17.1 R19.1 R20.2 U5.4 | length 561.1
  Top Layer w10: U5.4 665.82,-96.57 708.12,-96.57 771.93,-160.38 771.93,-337.93 785.8,-351.8 839.84,-351.8 862.32,-374.28 873.67,-374.28 C17.1@877.12,-377.72
  Top Layer w30: C17.1@882.69,-383.29 R20.2@937.64,-383.29 ; R20.2@938.68,-383.29 949.79,-383.29 949.97,-383.12 1000.93,-383.12 R19.1
pads on no net: U5.6 U5.7 U6.2 U6.3 U6.4 U6.5 U6.6 U6.8 U6.9 U6.19 U6.20 U6.21 U6.22 U6.23 U6.26 U6.28 U6.29 U6.30 U6.31 U6.32 U6.33 U6.38 U6.39 U6.44 U6.49 U6.50 U6.51 U6.52 U6.53 U6.54 U6.55 U6.56 U6.57 U6.58 U6.59 U6.60 U6.61 U6.62 U6.63 U6.64 U6.65 U6.66 U6.67 U6.68 U6.69 U6.74 U6.75 U6.76 U6.77 U6.78 U6.80 U6.81 U6.82 U6.83 U6.84 U6.85 U6.86 U6.87 U7.0 U7.2 U7.4 U7.5

## Polygon pours and split planes (outlines as drawn)
GND on Bottom Layer "NONET_L-01_P-001" (solid, remove dead copper, pour order 1): -25.72,256.72 328.91,256.72 328.19,256 559,256 565,262 565,493.62 601.51,530.13 1317,530.13 1317,2328 1201,2444 -215,2444 -439,2220 -439,670
GND on Top Layer "NONET_L-01_P-001" (solid, remove dead copper, pour order 0): -101,256 328.19,256 559,256 587.22,284.22 587.22,494.01 605.08,511.87 1317,511.87 1317,2328 1201,2444 -215,2444 -439,2220 -439,594

## Keep-outs
Keep-Out Layer:
  lines w10: 0,-669.29 0,2204.72 570.87,2204.72 570.87,2125.98 649.61,2125.98 649.61,2204.72 1220.47,2204.72 1220.47,-669.29 649.61,-669.29 649.61,-590.55 570.87,-590.55 570.87,-669.29 0,-669.29
  lines w30: 805,45.71 772,78.71 772,431.83 769.7,434.13 1131.56,434.13 1158.06,460.63 1158.06,493.92 ; 1048.34,32.2 1048.34,368.8

## Silkscreen, mask and mechanical layers (free items; w line width, h text height)
Top Overlay:
  lines w10: 376.9,631.2 455.87,631.2 ; 432.2,561.22 432.2,827.04
  text "SinglePower-4G-V1" at 31.15,519.57 h80 r270
  text "20250909" at 101.1,519.57 h80 r270
Bottom Overlay:
  lines w10: 0,0 1220.47,0 ; 0,1511.81 1218,1511.81
  text "接采样电阻" at 682.69,-19.34 h100 r90
  text "继电器" at 217.31,-126.68 h100 r90
  text "B" at 100.5,-266.51 h100
  text "负极" at 865.76,-271.93 h78.74
  text "A" at 276.72,-273.44 h100
  text "正极" at 557.05,-280.87 h78.74
  text "零线" at 979.04,-460.04 h100 r90
  text "火线" at 1173.65,-460.04 h100 r90

## Text inside footprints (layer, text, board x,y; h text height)
C3: Top Overlay "+" at 199.89,698.21 h60 r180
U2: Top Overlay "GND" at 409.34,417.2 h100 r90; Top Overlay "V+" at 319.34,417.2 h100 r90; Top Overlay "ACN" at 979.66,157.71 h100 r90; Top Overlay "ACL" at 1182.54,166.71 h100 r90